# EAGLE board hat (EAGLE 9.6.2)
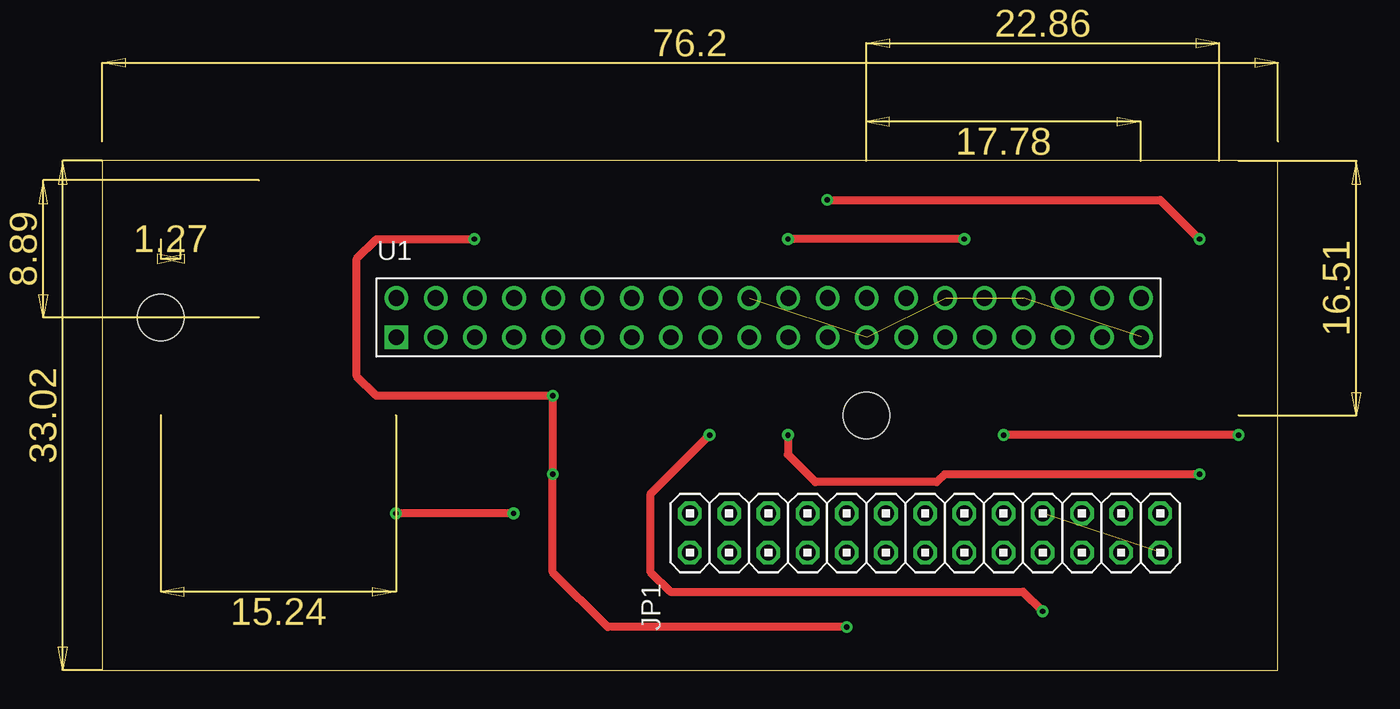
[diagram p0: board, top side]
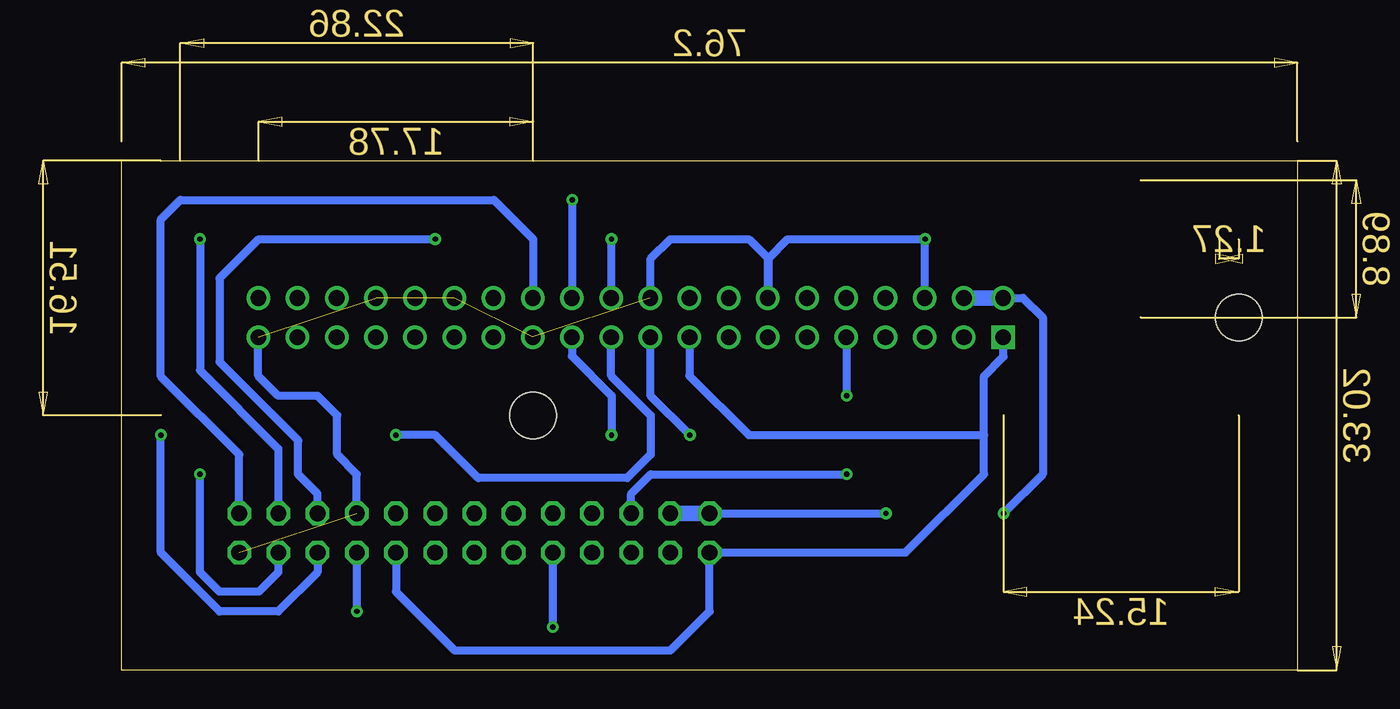
[diagram p1: board, bottom side, seen from below]

Size 76.2 x 33.02 mm. Coordinates in mm from the lower left corner, seen from the top.
Outline: 0,0 76.2,0 76.2,33.02 0,33.02 0,0
Copper layers (1*16): Top 0.035mm / dielectric 1.5mm / Bottom 0.035mm
Design rules "default": minimum track width 6mil, minimum drill 0.35mm, track to track 6mil, track to pad 6mil, pad to pad 6mil, via to via 6mil, smd to smd 6mil, copper to edge 40mil, drill to drill 6mil, minimum pad ring 10mil, minimum via ring 8mil, stop-mask expansion 4mil, vias tented up to drill 0mil, thermal gap 10mil
Holes 3 mm at 49.53,16.51 3.81,22.86

## Footprints (pad centres in the part's own frame; a part is rotated, then mirrored left to right if it is on the bottom)
2X13 = drill 1.016 octagon: 1 -15.24,-1.27; 2 -15.24,1.27; 3 -12.7,-1.27; 4 -12.7,1.27; 5 -10.16,-1.27; 6 -10.16,1.27; 7 -7.62,-1.27; 8 -7.62,1.27; 9 -5.08,-1.27; 10 -5.08,1.27; 11 -2.54,-1.27; 12 -2.54,1.27; 13 0,-1.27; 14 0,1.27; 15 2.54,-1.27; 16 2.54,1.27; 17 5.08,-1.27; 18 5.08,1.27; 19 7.62,-1.27; 20 7.62,1.27; 21 10.16,-1.27; 22 10.16,1.27; 23 12.7,-1.27; 24 12.7,1.27; 25 15.24,-1.27; 26 15.24,1.27
MODULE_RASPBERRY_PI_3B+_HDR = drill 1.016 square: 1 0.033,-0.011 | drill 1.016: 2 0.033,2.529; 3 2.573,-0.011; 4 2.573,2.529; 5 5.113,-0.011; 6 5.113,2.529; 7 7.653,-0.011; 8 7.653,2.529; 9 10.193,-0.011; 10 10.193,2.529; 11 12.733,-0.011; 12 12.733,2.529; 13 15.273,-0.011; 14 15.273,2.529; 15 17.813,-0.011; 16 17.813,2.529; 17 20.353,-0.011; 18 20.353,2.529; 19 22.893,-0.011; 20 22.893,2.529; 21 25.433,-0.011; 22 25.433,2.529; 23 27.973,-0.011; 24 27.973,2.529; 25 30.513,-0.011; 26 30.513,2.529; 27 33.053,-0.011; 28 33.053,2.529; 29 35.593,-0.011; 30 35.593,2.529; 31 38.133,-0.011; 32 38.133,2.529; 33 40.673,-0.011; 34 40.673,2.529; 35 43.213,-0.011; 36 43.213,2.529; 37 45.753,-0.011; 38 45.753,2.529; 39 48.293,-0.011; 40 48.293,2.529

## Placement (x,y rotation side)
JP1  [2X13]  53.34,8.89 0 top
U1  RASPBERRY_PI_3B+_HDRMODEL_RASPBEERY_PI_3B_HDR  [MODULE_RASPBERRY_PI_3B+_HDR]  19.05,21.59 0 top

## Library data of the parts
JP1 = pinhead
U1 = raspberry_pi_3b

## Nets
+3.3V: JP1.1 JP1.17 U1.1 U1.17
+5V: JP1.2 JP1.4 U1.2 U1.4
CE0: JP1.24 U1.24
CE1: JP1.26 U1.26
GND: JP1.6 JP1.9 JP1.20 JP1.25 U1.6 U1.9 U1.14 U1.20 U1.25 U1.30 U1.34 U1.39
N$1: JP1.23 U1.23
N$2: JP1.19 U1.19
N$3: JP1.21 U1.21
N$4: JP1.22 U1.22

## Tracks (layer width: path | path; a pad name or v marks a point on that pad's centre or on a via)
+3.3V
  Bottom 0.508: 20.32,15.24 20.32,12.7 25.4,7.62 JP1.1 38.1,3.81 40.64,1.27 54.61,1.27 58.42,5.08 JP1.17 | 20.32,15.24 20.32,19.05 19.05,20.32 19.05,21.55 U1.1 | U1.17 39.4,19.08 35.56,15.24 20.32,15.24
+5V  (via drill 0.35)
  Top 0.508: v26.67,10.16 v19.05,10.16
  Bottom 0.508: JP1.2 v26.67,10.16 | v19.05,10.16 16.51,12.7 16.51,22.86 17.78,24.13 17.79,24.12 U1.2
  Bottom 1.016: JP1.4 JP1.2 | U1.4 U1.2
CE0  (via drill 0.35)
  Top 0.508: v46.99,30.48 68.58,30.48 v71.12,27.94
  Bottom 0.508: v46.99,30.48 47.02,30.45 U1.24 | JP1.24 66.04,14.35 71.12,19.43 v71.12,27.94
CE1
  Bottom 0.508: U1.26 49.53,24.15 49.53,27.94 52.07,30.48 72.39,30.48 73.66,29.21 73.66,19.05 68.58,13.97 JP1.26
GND  (via drill 0.35)  (5 unrouted)
  Top 0.508: v48.26,2.79 32.77,2.79 29.21,6.35 v29.21,12.7 v29.21,17.78 17.78,17.78 16.51,19.05 16.51,26.67 17.78,27.94 v24.13,27.94
  Bottom 0.508: JP1.6 43.18,11.43 41.91,12.7 v29.21,12.7 | U1.9 29.24,17.81 v29.21,17.78 | JP1.9 v48.26,2.79 | U1.6 24.16,27.91 v24.13,27.94 33.04,27.94 34.32,26.66 U1.14 34.29,24.15 34.29,26.67 35.56,27.94 40.64,27.94 41.91,26.67 41.91,24.15 U1.20 | JP1.20 60.96,12.7 62.23,13.97 62.23,16.51 63.5,17.78 66.04,17.78 67.34,19.08 U1.39
N$1  (via drill 0.35)
  Top 0.508: v44.45,15.24 44.45,13.97 46.23,12.19 54.1,12.19 54.61,12.7 v71.12,12.7
  Bottom 0.508: JP1.23 66.04,6.35 67.31,5.08 69.85,5.08 71.12,6.35 v71.12,12.7 | 47.02,21.56 U1.23 47.02,20.35 44.45,17.78 v44.45,15.24
N$2  (via drill 0.35)
  Top 0.508: v39.37,15.24 35.56,11.43 35.56,6.35 36.83,5.08 59.69,5.08 v60.96,3.81
  Bottom 0.508: U1.19 41.94,17.81 v39.37,15.24 | JP1.19 v60.96,3.81
N$3  (via drill 0.35)
  Top 0.508: v73.66,15.24 v58.42,15.24
  Bottom 0.508: JP1.21 63.5,6.35 66.04,3.81 69.85,3.81 73.66,7.62 v73.66,15.24 | U1.21 44.48,19.08 41.91,16.51 41.91,13.97 43.43,12.45 53.09,12.45 55.88,15.24 v58.42,15.24
N$4  (via drill 0.35)
  Top 0.508: v55.88,27.94 v44.45,27.94
  Bottom 0.508: v55.88,27.94 67.31,27.94 69.85,25.4 69.85,19.98 64.75,14.88 64.77,14.85 64.77,12.7 63.5,11.43 JP1.22 | v44.45,27.94 44.48,27.91 U1.22